# EAGLE board QT Proto (EAGLE 9.7.0)
REV: B
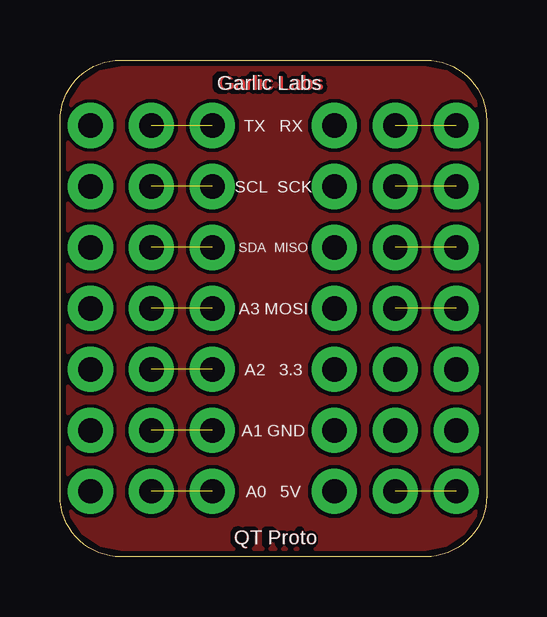
[diagram p0: board, top side]
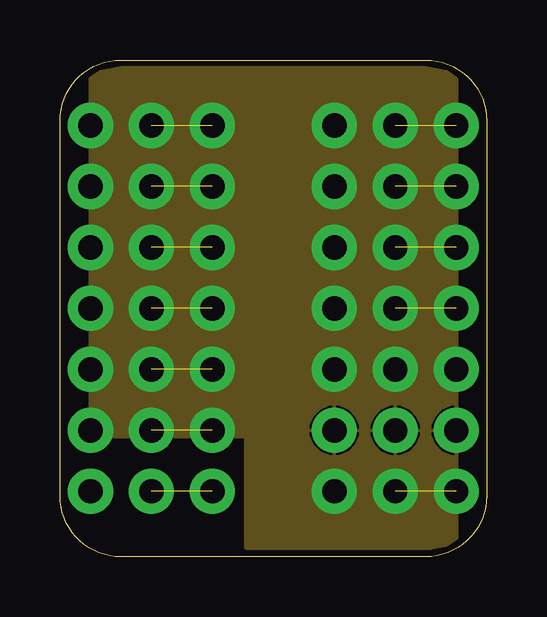
[diagram p1: board, inner layer Route2]
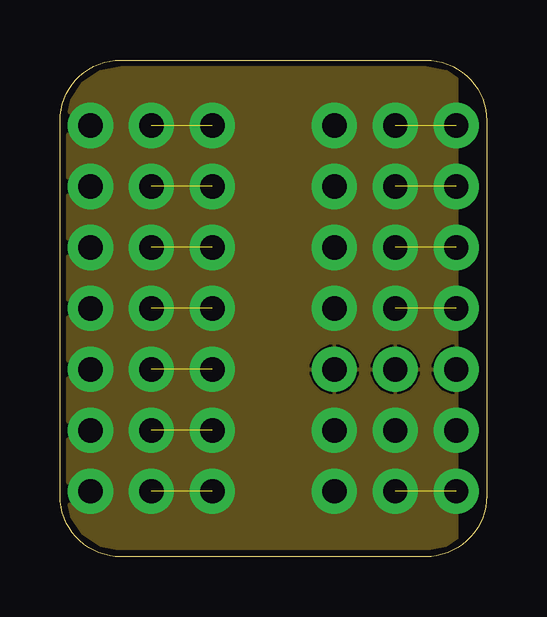
[diagram p2: board, inner layer Route15]
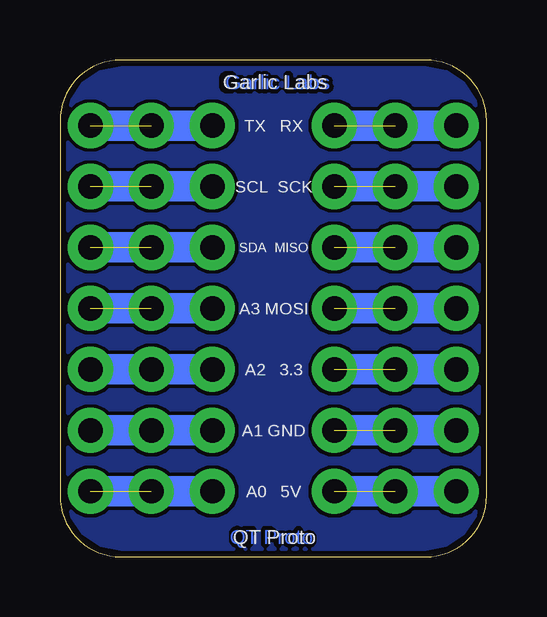
[diagram p3: board, bottom side, seen from below]

Size 17.78 x 20.7 mm. Coordinates in mm from the lower left corner, seen from the top.
Outline: 17.78,18.16 17.78,2.54 arc-90 15.24,0 2.54,0 arc-90 0,2.54 0,18.16 arc-90 2.54,20.7 15.24,20.7 arc-90 17.78,18.16
Copper layers (1*16): Top / Bottom
Stack-up 2 Layer Stack: Top SolderMask SR:Green 0.0254mm Dk 4.3 / Top Surface Finish Lead-Free 0.02mm / Top CuFoil:007 0.035mm / Dielectric-1 Core:084 1.067mm / Bottom CuFoil:007 0.035mm / Bottom Surface Finish Lead-Free 0.02mm / Bottom SolderMask SR:Green 0.0254mm Dk 4.3
Design rules "adafruit 6-6 *": minimum track width 6mil, minimum drill 15.5mil, track to track 6mil, track to pad 6mil, pad to pad 6mil, via to via 6mil, smd to smd 6mil, copper to edge 10mil, drill to drill 8mil, minimum pad ring 10mil, minimum via ring 8mil, stop-mask expansion 2mil, vias tented up to drill 20mil, thermal gap 10mil
Net classes: 1 power: width 0.254 mm; 2 gnd: width 0.254 mm

## Footprints (pad centres in the part's own frame; a part is rotated, then mirrored left to right if it is on the bottom)
1X07_NO_SILK = drill 1.016 pad 1.88: 1 0,0; 2 2.54,0; 3 5.08,0; 4 7.62,0; 5 10.16,0; 6 12.7,0; 7 15.24,0
1X02_NO_SILK = drill 1.016 pad 1.88: 1 0,0; 2 2.54,0

## Placement (x,y rotation side)
FRAME1  FRAME-LETTERNO_PACKAGE  [DUMMY]  -6.53,-4.76 0 top  (outside the outline)
J1  [1X07_NO_SILK]  1.27,17.97 270 top
J2  [1X07_NO_SILK]  16.51,2.73 90 top
J3  [1X02_NO_SILK]  3.81,2.73 0 top
J4  [1X02_NO_SILK]  3.81,5.27 0 top
J5  [1X02_NO_SILK]  3.81,7.81 0 top
J6  [1X02_NO_SILK]  3.81,10.35 0 top
J7  [1X02_NO_SILK]  3.81,12.89 0 top
J8  [1X02_NO_SILK]  3.81,15.43 0 top
J9  [1X02_NO_SILK]  3.81,17.97 0 top
J10  [1X02_NO_SILK]  13.97,2.73 180 top
J11  [1X02_NO_SILK]  13.97,5.27 180 top
J12  [1X02_NO_SILK]  13.97,7.81 180 top
J13  [1X02_NO_SILK]  13.97,10.35 180 top
J14  [1X02_NO_SILK]  13.97,12.89 180 top
J15  [1X02_NO_SILK]  13.97,15.43 180 top
J16  [1X02_NO_SILK]  13.97,17.97 180 top

## Library data of the parts
FRAME1 = SparkFun-Aesthetics; DESIGNER: Nobody; VERSION: v01
J1 J2 = Push-Fit_CONN
J3-J16 = SparkFun-Connectors

## Nets
3.3V: J2.3 J12.1 J12.2
+5V [power]: J2.1 J10.1 J10.2
A0: J1.7 J3.1 J3.2
A1: J1.6 J4.1 J4.2
A2: J1.5 J5.1 J5.2
A3: J1.4 J6.1 J6.2
GND [power]: J2.2 J11.1 J11.2
MISO: J2.5 J14.1 J14.2
MOSI: J2.4 J13.1 J13.2
RX: J2.7 J16.1 J16.2
SCK: J2.6 J15.1 J15.2
SCL: J1.2 J8.1 J8.2
SDA: J1.3 J7.1 J7.2
TX: J1.1 J9.1 J9.2

## Tracks (layer width: path | path; a pad name or v marks a point on that pad's centre or on a via)
3.3V
  Bottom 1.27: J12.2 J2.3
  pour Route15: 16.6,20.79 -0.08,20.79 -0.08,0.29 16.6,0.29
+5V  (1 unrouted)
  Bottom 1.27: J10.2 J2.1
A0  (1 unrouted)
  Bottom 1.27: J1.7 J3.2
A1  (1 unrouted)
  Bottom 1.27: J4.2 J1.6
A2  (1 unrouted)
  Bottom 1.27: J1.5 J5.2
A3  (1 unrouted)
  Bottom 1.27: J6.2 J1.4
GND
  Bottom 1.27: J2.2 J11.2
  pour Route2: 16.59,20.78 1.19,20.78 1.19,4.94 7.67,4.94 7.67,0.3 16.59,0.3
MISO  (1 unrouted)
  Bottom 1.27: J14.2 J2.5
MOSI  (1 unrouted)
  Bottom 1.27: J2.4 J13.2
N$1
  pour Top: 0,18.16 0,2.54 arc90 2.54,0 15.24,0 arc90 17.78,2.54 17.78,18.16 arc90 15.24,20.7 2.54,20.7 arc90
N$2
  pour Bottom: 0,18.16 0,2.54 arc90 2.54,0 15.24,0 arc90 17.78,2.54 17.78,18.16 arc90 15.24,20.7 2.54,20.7 arc90
RX  (1 unrouted)
  Bottom 1.27: J2.7 J16.2
SCK  (1 unrouted)
  Bottom 1.27: J2.6 J15.2
SCL  (1 unrouted)
  Bottom 1.27: J8.2 J1.2
SDA  (1 unrouted)
  Bottom 1.27: J1.3 J7.2
TX  (1 unrouted)
  Bottom 1.27: J1.1 J9.2

## Text on the board
Top: Garlic Labs | QT Proto
Bottom: Garlic Labs | QT Proto
tPlace: Garlic Labs | TX RX | SCL SCK | SDA MISO | A3 MOSI | A2 3.3 | A1 GND | A0 5V | QT Proto
bPlace: Garlic Labs | TX RX | SCL SCK | SDA MISO | A3 MOSI | A2 3.3 | A1 GND | A0 5V | QT Proto